# Altium PCB PCB_AVlabs AV-GMK MK I_2_2024-01-18 (1).pcbdoc (part 1 of 5)
Units mil, origin at the board's own origin, x right, y up, seen from the top; angles counter-clockwise.
Board outline 17777.1 x 9140.8 mil, 2 copper layers (Top Layer, Bottom Layer); 156 components, 279 nets, 1257 pads, 596 vias.
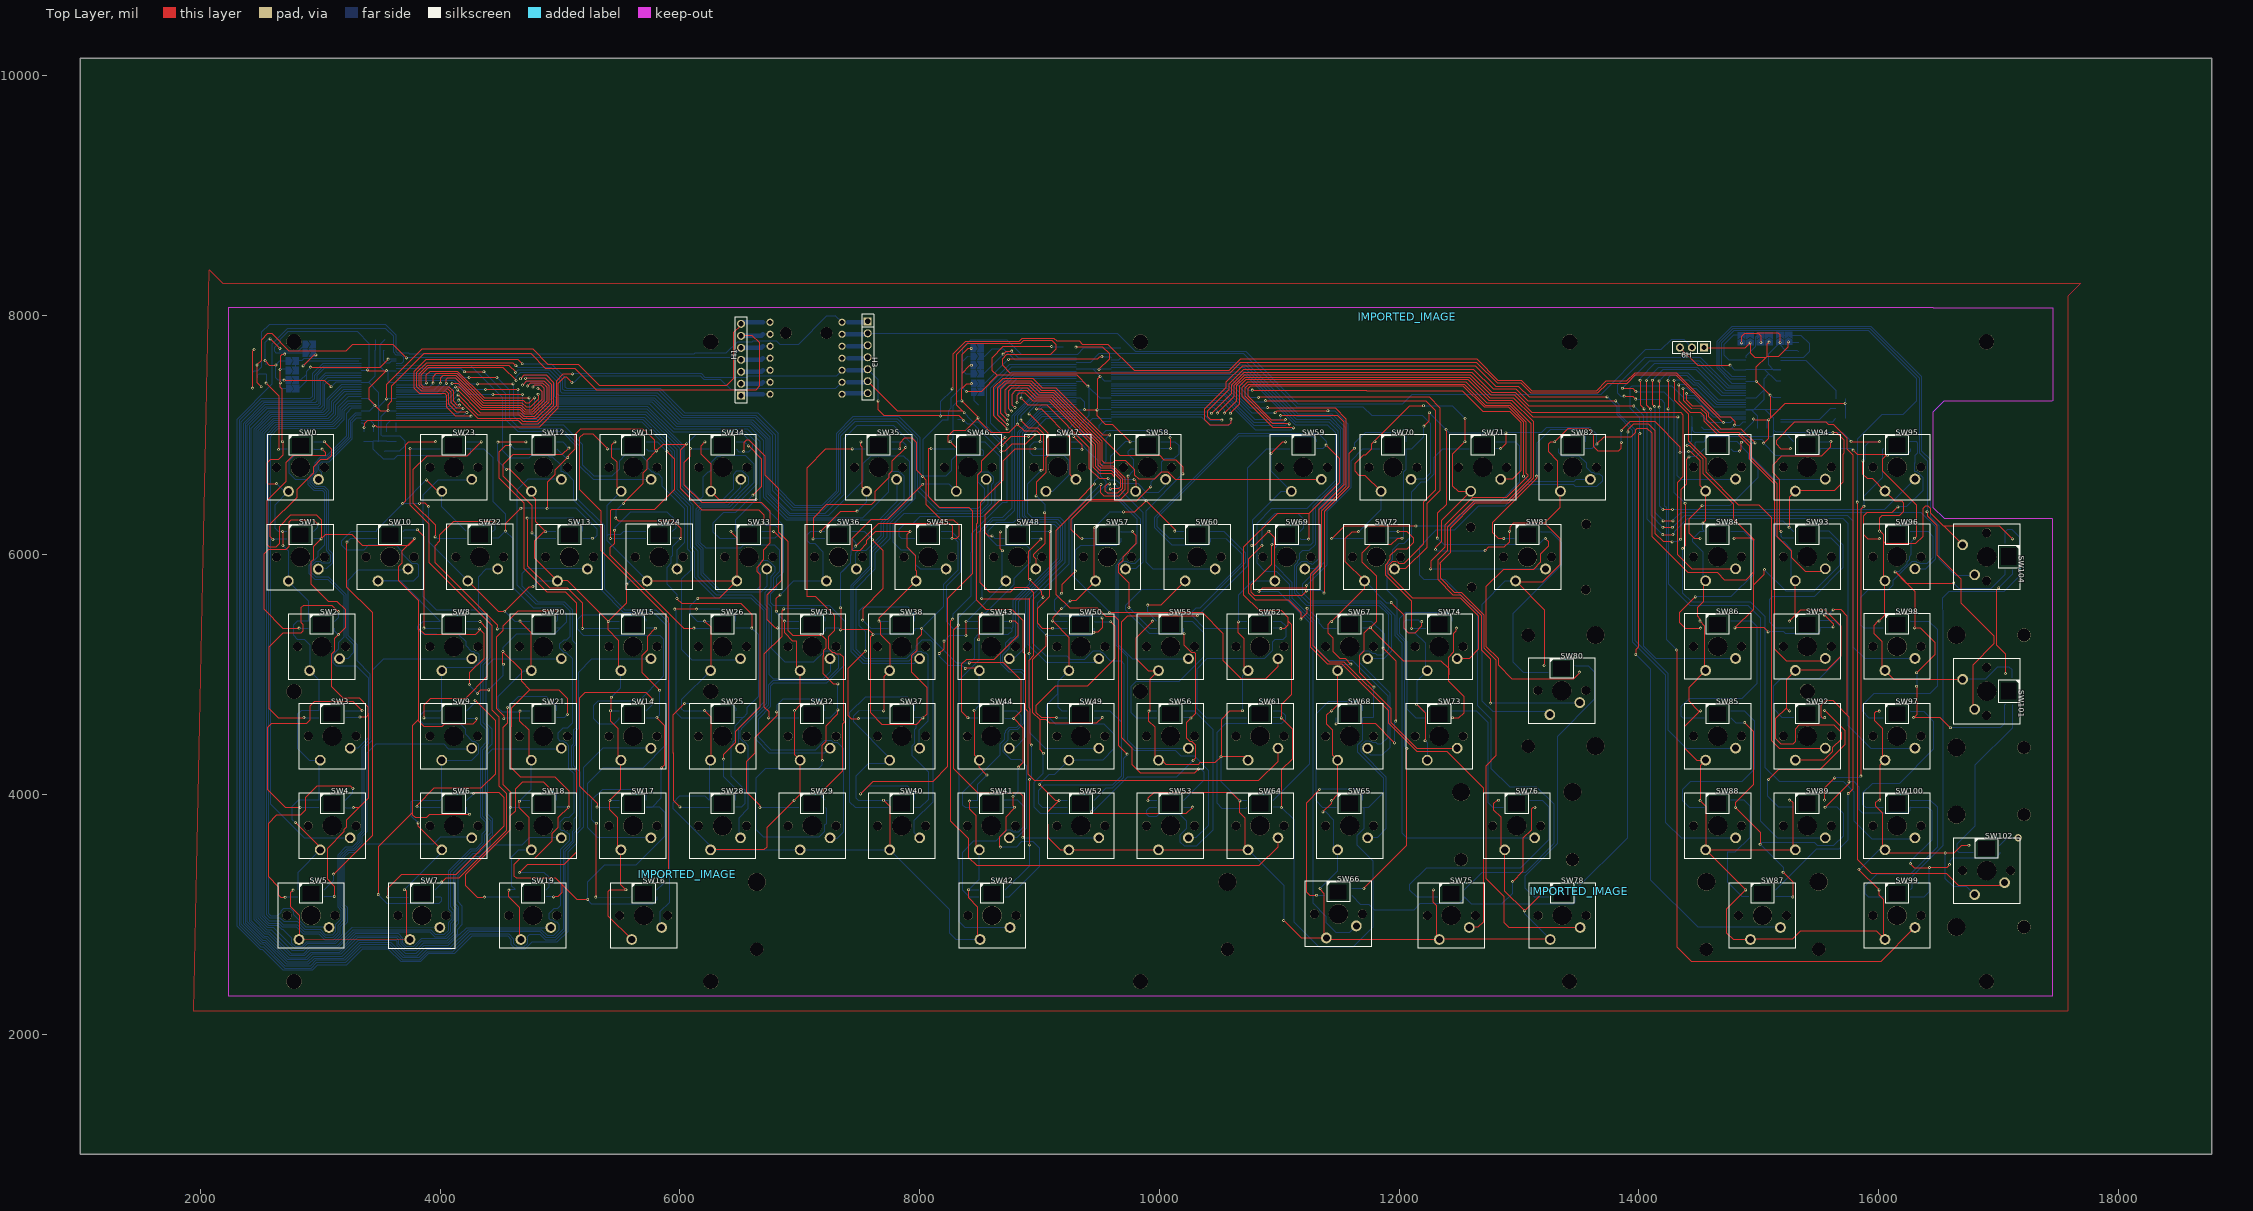
[diagram p0: Top Layer view]
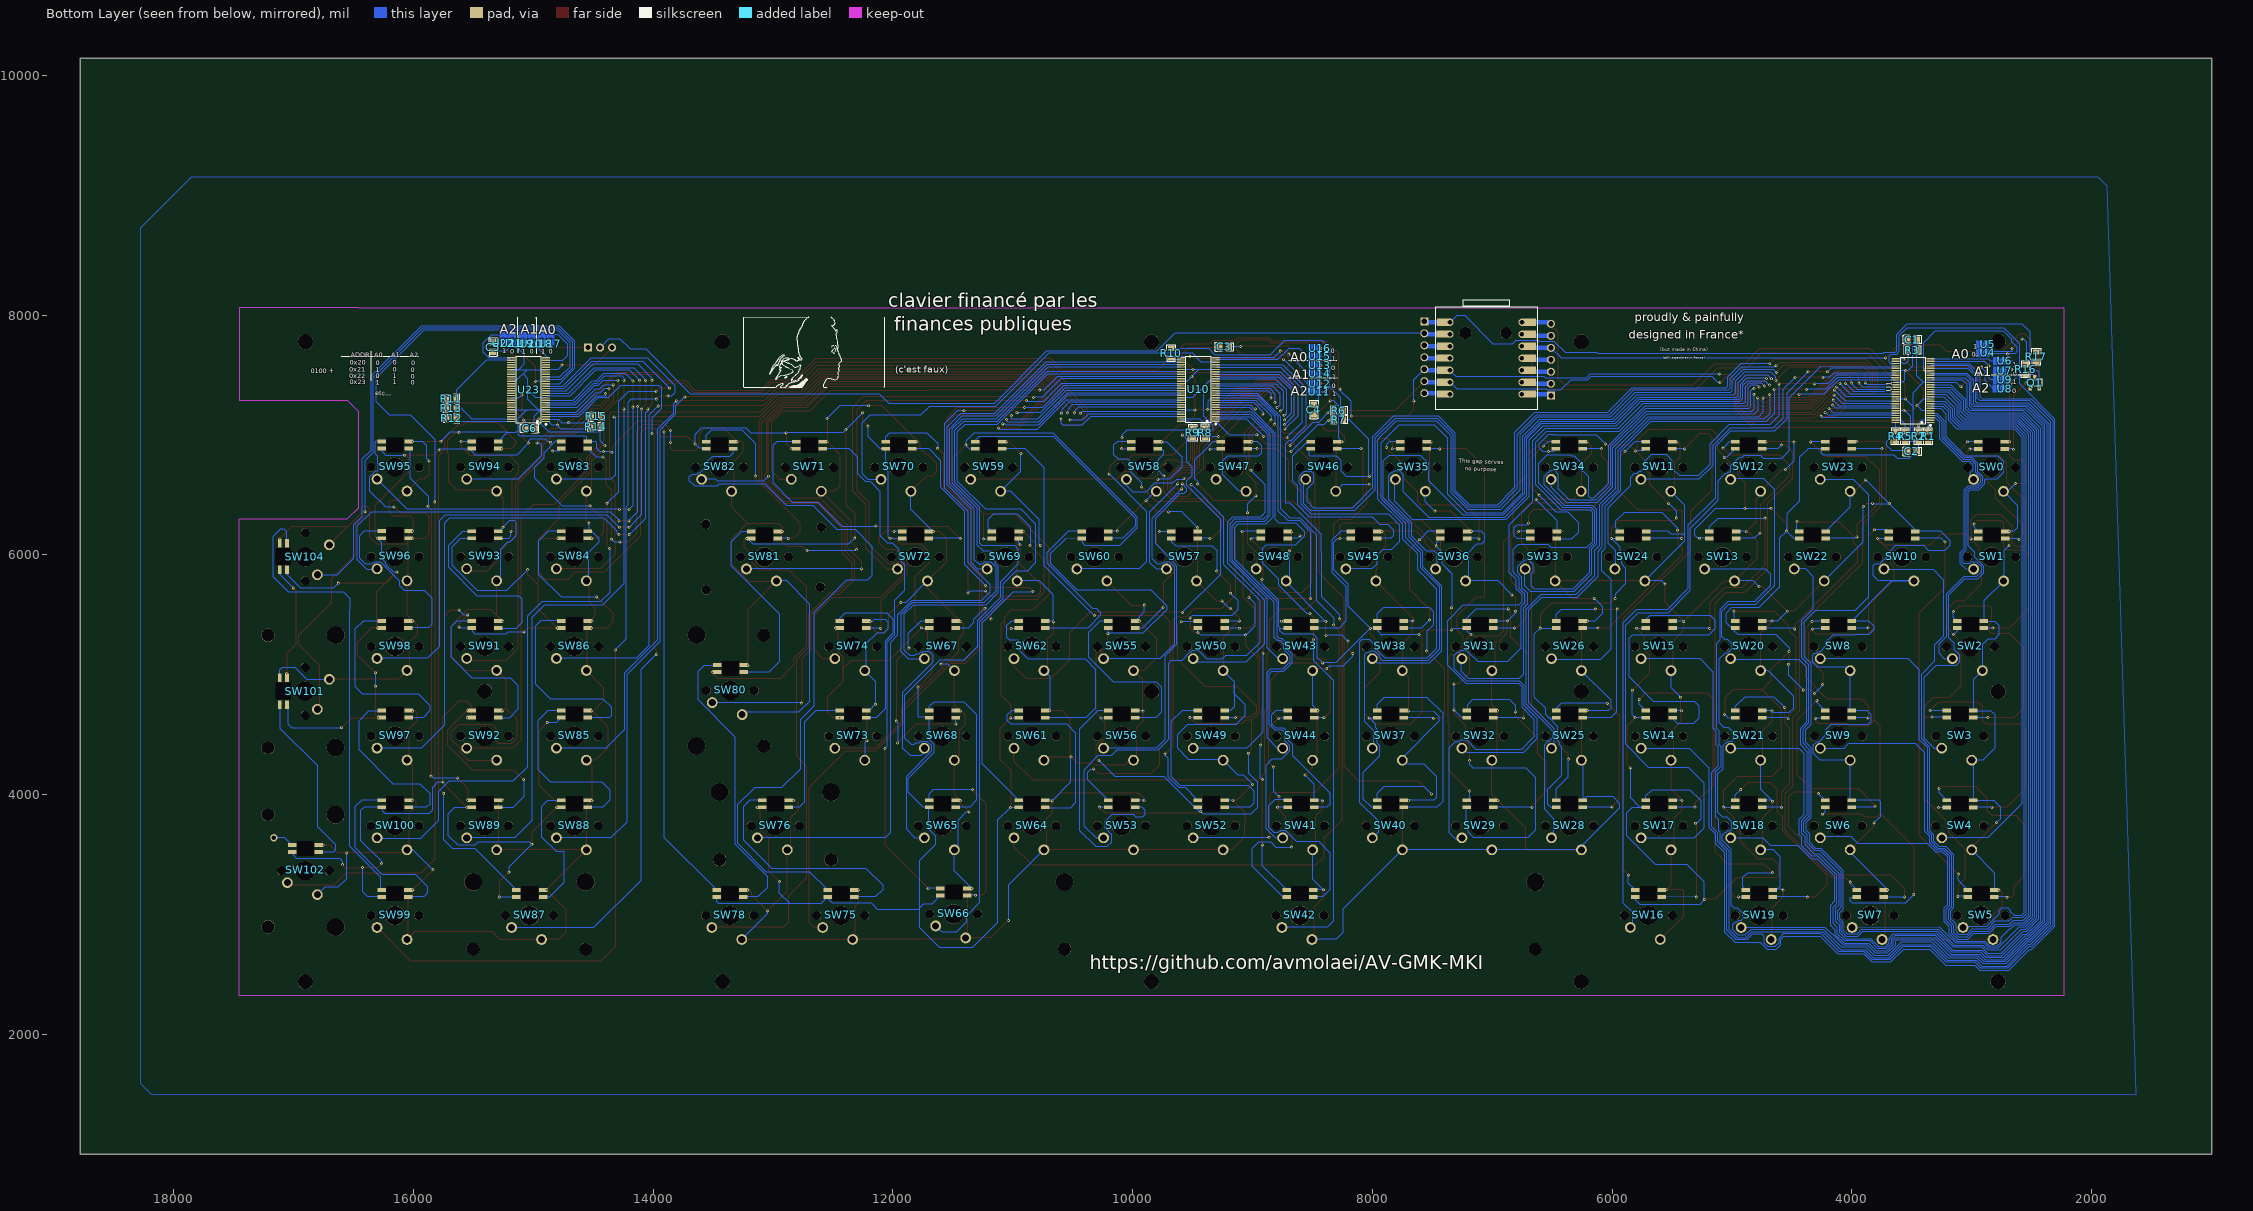
[diagram p1: Bottom Layer view, seen from below]

## Layer stack, top to bottom
Top Layer: signal copper (thickness not stored)
Dielectric: dielectric 12.6, FR-4, Dk 4.8
Bottom Layer: signal copper (thickness not stored)

## Board outline
18777.1,1000 1000,1000 1000,10140.8 18777.1,10140.8

## Components (designator, comment, footprint, x,y, rotation, side; value= is the part's Value field where it differs from the comment)
C1 "100nF" C0805 3498.7,7794.8 r180 bottom
C2 "100nF" C0805 3500.6,6863.3 r180 bottom
C3 "100nF" C0805 9237.9,7733.9 r180 bottom
C4 "100nF" C0805 8488.4,7211.4 r90 bottom
C5 "100nF" C0805 15331.7,7733.1 r90 bottom
C6 "100nF" C0805 15029,7053.8 r0 bottom
H1 "X6511WV-07H-C30D60" HDR-TH_7P-P2.54-V-M 6510.8,7626.8 r90 top
H3 "X6511WV-07H-C30D60" HDR-TH_7P-P2.54-V-M 7567.1,7647.7 r270 top
H9 "PCA_PINS" HDR-TH_3P-P2.54-V-M 14441.9,7728.5 r180 top
IMPORTED_IMAGE "IMPORTED_IMAGE" IMPORTED_IMAGE 13503.56,3192.67 r0 top
IMPORTED_IMAGE "IMPORTED_IMAGE" IMPORTED_IMAGE 6062.95,3334.43 r0 top
IMPORTED_IMAGE "IMPORTED_IMAGE" IMPORTED_IMAGE 12067.75,7984.55 r0 top
Q1 "BSS138NH6327" SOT-23-3_L2.9-W1.3-P1.90-LS2.4-BR 2474.6,7436.4 r90 bottom
R1 "4.7kΩ" R0805 3365.2,6987.6 r270 bottom
R2 "4.7kΩ" R0805 3443.5,6987.5 r270 bottom
R3 "1.1kΩ" R0805 3497.2,7708.1 r180 bottom
R4 "1.1kΩ" R0805 3634.7,6987.2 r270 bottom
R5 "2kΩ" R0805 3556.4,6987.4 r270 bottom
R6 "4.7kΩ" R0805 8280.9,7202.5 r180 bottom
R7 "4.7kΩ" R0805 8280.1,7127.8 r180 bottom
R8 "2kΩ" R0805 9396.2,7017.9 r270 bottom
R9 "1.1kΩ" R0805 9498.1,7017.3 r270 bottom
R10 "1.1kΩ" R0805 9679.1,7683.1 r90 bottom
R11 "1.1kΩ" R0805 15681.6,7301.8 r0 bottom
R12 "1.1kΩ" R0805 15680.8,7137.6 r0 bottom
R13 "2kΩ" R0805 15681.7,7223 r0 bottom
R14 "4.7kΩ" R0805 14479.4,7069 r180 bottom
R15 "4.7kΩ" R0805 14475.2,7154.6 r180 bottom
R16 "10kΩ" R0805 2552,7546.3 r270 bottom
R17 "10kΩ" R0805 2462.3,7652.6 r90 bottom
SW0 "CHERRYMX_1U_SK6812_MINI_E" CHERRYMX_1U_SK6812_MINI-E 2836,6729 r0 top
SW1 "CHERRYMX_1U_SK6812_MINI_E" CHERRYMX_1U_SK6812_MINI-E 2834.8,5981.1 r0 top
SW2 "CHERRYMX_1U_SK6812_MINI_E" CHERRYMX_1U_SK6812_MINI-E 3012.3,5233.8 r0 top
SW3 "CHERRYMX_1U_SK6812_MINI_E" CHERRYMX_1U_SK6812_MINI-E 3100.9,4487 r0 top
SW4 "CHERRYMX_1U_SK6812_MINI_E" CHERRYMX_1U_SK6812_MINI-E 3100.8,3739 r0 top
SW5 "CHERRYMX_1U_SK6812_MINI_E" CHERRYMX_1U_SK6812_MINI-E 2923.8,2991.3 r0 top
SW6 "CHERRYMX_1U_SK6812_MINI_E" CHERRYMX_1U_SK6812_MINI-E 4114.7,3739.3 r0 top
SW7 "CHERRYMX_1U_SK6812_MINI_E" CHERRYMX_1U_SK6812_MINI-E 3848.9,2991.1 r0 top
SW8 "CHERRYMX_1U_SK6812_MINI_E" CHERRYMX_1U_SK6812_MINI-E 4114.7,5233.6 r0 top
SW9 "CHERRYMX_1U_SK6812_MINI_E" CHERRYMX_1U_SK6812_MINI-E 4114.5,4486.6 r0 top
SW10 "CHERRYMX_1U_SK6812_MINI_E" CHERRYMX_1U_SK6812_MINI-E 3583.1,5981.8 r0 top
SW11 "CHERRYMX_1U_SK6812_MINI_E" CHERRYMX_1U_SK6812_MINI-E 5610.7,6729.8 r0 top
SW12 "CHERRYMX_1U_SK6812_MINI_E" CHERRYMX_1U_SK6812_MINI-E 4862.4,6729.8 r0 top
SW13 "CHERRYMX_1U_SK6812_MINI_E" CHERRYMX_1U_SK6812_MINI-E 5079.2,5981.8 r0 top
SW14 "CHERRYMX_1U_SK6812_MINI_E" CHERRYMX_1U_SK6812_MINI-E 5609.1,4486.5 r0 top
SW15 "CHERRYMX_1U_SK6812_MINI_E" CHERRYMX_1U_SK6812_MINI-E 5609.1,5233.8 r0 top
SW16 "CHERRYMX_1U_SK6812_MINI_E" CHERRYMX_1U_SK6812_MINI-E 5699,2991.4 r0 top
SW17 "CHERRYMX_1U_SK6812_MINI_E" CHERRYMX_1U_SK6812_MINI-E 5609.1,3739.3 r0 top
SW18 "CHERRYMX_1U_SK6812_MINI_E" CHERRYMX_1U_SK6812_MINI-E 4861.9,3739.3 r0 top
SW19 "CHERRYMX_1U_SK6812_MINI_E" CHERRYMX_1U_SK6812_MINI-E 4774.2,2991.3 r0 top
SW20 "CHERRYMX_1U_SK6812_MINI_E" CHERRYMX_1U_SK6812_MINI-E 4861.9,5233.8 r0 top
SW21 "CHERRYMX_1U_SK6812_MINI_E" CHERRYMX_1U_SK6812_MINI-E 4861.9,4486.5 r0 top
SW22 "CHERRYMX_1U_SK6812_MINI_E" CHERRYMX_1U_SK6812_MINI-E 4331.3,5981.9 r0 top
SW23 "CHERRYMX_1U_SK6812_MINI_E" CHERRYMX_1U_SK6812_MINI-E 4114.7,6729.7 r0 top
SW24 "CHERRYMX_1U_SK6812_MINI_E" CHERRYMX_1U_SK6812_MINI-E 5827.3,5981.9 r0 top
SW25 "CHERRYMX_1U_SK6812_MINI_E" CHERRYMX_1U_SK6812_MINI-E 6356.4,4486.5 r0 top
SW26 "CHERRYMX_1U_SK6812_MINI_E" CHERRYMX_1U_SK6812_MINI-E 6356.4,5233.8 r0 top
SW28 "CHERRYMX_1U_SK6812_MINI_E" CHERRYMX_1U_SK6812_MINI-E 6356.3,3739.3 r0 top
SW29 "CHERRYMX_1U_SK6812_MINI_E" CHERRYMX_1U_SK6812_MINI-E 7103.6,3739.3 r0 top
SW31 "CHERRYMX_1U_SK6812_MINI_E" CHERRYMX_1U_SK6812_MINI-E 7103.6,5233.7 r0 top
SW32 "CHERRYMX_1U_SK6812_MINI_E" CHERRYMX_1U_SK6812_MINI-E 7103.5,4486.5 r0 top
SW33 "CHERRYMX_1U_SK6812_MINI_E" CHERRYMX_1U_SK6812_MINI-E 6575.3,5981.8 r0 top
SW34 "CHERRYMX_1U_SK6812_MINI_E" CHERRYMX_1U_SK6812_MINI-E 6358.7,6729.8 r0 top
SW35 "CHERRYMX_1U_SK6812_MINI_E" CHERRYMX_1U_SK6812_MINI-E 7658.3,6729.6 r0 top
SW36 "CHERRYMX_1U_SK6812_MINI_E" CHERRYMX_1U_SK6812_MINI-E 7323,5981.7 r0 top
SW37 "CHERRYMX_1U_SK6812_MINI_E" CHERRYMX_1U_SK6812_MINI-E 7850.7,4486.6 r0 top
SW38 "CHERRYMX_1U_SK6812_MINI_E" CHERRYMX_1U_SK6812_MINI-E 7850.8,5233.8 r0 top
SW40 "CHERRYMX_1U_SK6812_MINI_E" CHERRYMX_1U_SK6812_MINI-E 7850.7,3739.3 r0 top
SW41 "CHERRYMX_1U_SK6812_MINI_E" CHERRYMX_1U_SK6812_MINI-E 8598,3739.3 r0 top
SW42 "CHERRYMX_1U_SK6812_MINI_E" CHERRYMX_1U_SK6812_MINI-E 8604.6,2991.3 r0 top
SW43 "CHERRYMX_1U_SK6812_MINI_E" CHERRYMX_1U_SK6812_MINI-E 8598.1,5233.8 r0 top
SW44 "CHERRYMX_1U_SK6812_MINI_E" CHERRYMX_1U_SK6812_MINI-E 8598.1,4486.5 r0 top
SW45 "CHERRYMX_1U_SK6812_MINI_E" CHERRYMX_1U_SK6812_MINI-E 8071.2,5981.8 r0 top
SW46 "CHERRYMX_1U_SK6812_MINI_E" CHERRYMX_1U_SK6812_MINI-E 8406,6729.9 r0 top
SW47 "CHERRYMX_1U_SK6812_MINI_E" CHERRYMX_1U_SK6812_MINI-E 9154,6729.8 r0 top
SW48 "CHERRYMX_1U_SK6812_MINI_E" CHERRYMX_1U_SK6812_MINI-E 8819.4,5981.8 r0 top
SW49 "CHERRYMX_1U_SK6812_MINI_E" CHERRYMX_1U_SK6812_MINI-E 9345.3,4486.5 r0 top
SW50 "CHERRYMX_1U_SK6812_MINI_E" CHERRYMX_1U_SK6812_MINI-E 9345.3,5233.8 r0 top
SW52 "CHERRYMX_1U_SK6812_MINI_E" CHERRYMX_1U_SK6812_MINI-E 9345.3,3739.3 r0 top
SW53 "CHERRYMX_1U_SK6812_MINI_E" CHERRYMX_1U_SK6812_MINI-E 10092.6,3739.3 r0 top
SW55 "CHERRYMX_1U_SK6812_MINI_E" CHERRYMX_1U_SK6812_MINI-E 10092.6,5233.8 r0 top
SW56 "CHERRYMX_1U_SK6812_MINI_E" CHERRYMX_1U_SK6812_MINI-E 10092.6,4486.6 r0 top
SW57 "CHERRYMX_1U_SK6812_MINI_E" CHERRYMX_1U_SK6812_MINI-E 9567.4,5981.8 r0 top
SW58 "CHERRYMX_1U_SK6812_MINI_E" CHERRYMX_1U_SK6812_MINI-E 9902,6729.8 r0 top
SW59 "CHERRYMX_1U_SK6812_MINI_E" CHERRYMX_1U_SK6812_MINI-E 11201.2,6729.8 r0 top
SW60 "CHERRYMX_1U_SK6812_MINI_E" CHERRYMX_1U_SK6812_MINI-E 10315.4,5981.8 r0 top
SW61 "CHERRYMX_1U_SK6812_MINI_E" CHERRYMX_1U_SK6812_MINI-E 10839.8,4486.6 r0 top
SW62 "CHERRYMX_1U_SK6812_MINI_E" CHERRYMX_1U_SK6812_MINI-E 10839.8,5233.8 r0 top
SW64 "CHERRYMX_1U_SK6812_MINI_E" CHERRYMX_1U_SK6812_MINI-E 10839.8,3739.3 r0 top
SW65 "CHERRYMX_1U_SK6812_MINI_E" CHERRYMX_1U_SK6812_MINI-E 11587,3739.3 r0 top
SW66 "CHERRYMX_1U_SK6812_MINI_E" CHERRYMX_1U_SK6812_MINI-E 11492.8,3004.2 r0 top
SW67 "CHERRYMX_1U_SK6812_MINI_E" CHERRYMX_1U_SK6812_MINI-E 11587,5233.8 r0 top
SW68 "CHERRYMX_1U_SK6812_MINI_E" CHERRYMX_1U_SK6812_MINI-E 11587,4486.5 r0 top
SW69 "CHERRYMX_1U_SK6812_MINI_E" CHERRYMX_1U_SK6812_MINI-E 11063.4,5981.8 r0 top
SW70 "CHERRYMX_1U_SK6812_MINI_E" CHERRYMX_1U_SK6812_MINI-E 11949.2,6729.8 r0 top
SW71 "CHERRYMX_1U_SK6812_MINI_E" CHERRYMX_1U_SK6812_MINI-E 12697.2,6729.9 r0 top
SW72 "CHERRYMX_1U_SK6812_MINI_E" CHERRYMX_1U_SK6812_MINI-E 11811.4,5981.8 r0 top
SW73 "CHERRYMX_1U_SK6812_MINI_E" CHERRYMX_1U_SK6812_MINI-E 12334.3,4486.5 r0 top
SW74 "CHERRYMX_1U_SK6812_MINI_E" CHERRYMX_1U_SK6812_MINI-E 12334.2,5233.8 r0 top
SW75 "CHERRYMX_1U_SK6812_MINI_E" CHERRYMX_1U_SK6812_MINI-E 12435,2991.3 r0 top
SW76 "CHERRYMX_1U_SK6812_MINI_E" CHERRYMX_1U_SK6812_MINI-E 12980.7,3739.3 r0 top
SW78 "CHERRYMX_1U_SK6812_MINI_E" CHERRYMX_1U_SK6812_MINI-E 13360.2,2991.3 r0 top
SW80 "CHERRYMX_1U_SK6812_MINI_E" CHERRYMX_1U_SK6812_MINI-E 13356.7,4867.2 r0 top
SW81 "CHERRYMX_1U_SK6812_MINI_E" CHERRYMX_1U_SK6812_MINI-E 13071.3,5981.8 r0 top
SW82 "CHERRYMX_1U_SK6812_MINI_E" CHERRYMX_1U_SK6812_MINI-E 13445.4,6729.8 r0 top
SW83 "CHERRYMX_1U_SK6812_MINI_E" CHERRYMX_1U_SK6812_MINI-E 14656.4,6731.4 r0 top
SW84 "CHERRYMX_1U_SK6812_MINI_E" CHERRYMX_1U_SK6812_MINI-E 14656.4,5983.4 r0 top
SW85 "CHERRYMX_1U_SK6812_MINI_E" CHERRYMX_1U_SK6812_MINI-E 14656.4,4487.3 r0 top
SW86 "CHERRYMX_1U_SK6812_MINI_E" CHERRYMX_1U_SK6812_MINI-E 14656.4,5235.4 r0 top
SW87 "CHERRYMX_1U_SK6812_MINI_E" CHERRYMX_1U_SK6812_MINI-E 15030.4,2991.3 r0 top
SW88 "CHERRYMX_1U_SK6812_MINI_E" CHERRYMX_1U_SK6812_MINI-E 14656.4,3739.3 r0 top
SW89 "CHERRYMX_1U_SK6812_MINI_E" CHERRYMX_1U_SK6812_MINI-E 15404.4,3739.3 r0 top
SW91 "CHERRYMX_1U_SK6812_MINI_E" CHERRYMX_1U_SK6812_MINI-E 15404.4,5235.3 r0 top
SW92 "CHERRYMX_1U_SK6812_MINI_E" CHERRYMX_1U_SK6812_MINI-E 15404.4,4487.3 r0 top
SW93 "CHERRYMX_1U_SK6812_MINI_E" CHERRYMX_1U_SK6812_MINI-E 15404.5,5983.4 r0 top
SW94 "CHERRYMX_1U_SK6812_MINI_E" CHERRYMX_1U_SK6812_MINI-E 15404.5,6731.4 r0 top
SW95 "CHERRYMX_1U_SK6812_MINI_E" CHERRYMX_1U_SK6812_MINI-E 16152.4,6731.4 r0 top
SW96 "CHERRYMX_1U_SK6812_MINI_E" CHERRYMX_1U_SK6812_MINI-E 16152.4,5983.5 r0 top
SW97 "CHERRYMX_1U_SK6812_MINI_E" CHERRYMX_1U_SK6812_MINI-E 16152.4,4487.4 r0 top
SW98 "CHERRYMX_1U_SK6812_MINI_E" CHERRYMX_1U_SK6812_MINI-E 16152.5,5235.4 r0 top
SW99 "CHERRYMX_1U_SK6812_MINI_E" CHERRYMX_1U_SK6812_MINI-E 16152.6,2991.3 r0 top
SW100 "CHERRYMX_1U_SK6812_MINI_E" CHERRYMX_1U_SK6812_MINI-E 16152.4,3739.3 r0 top
SW101 "CHERRYMX_1U_SK6812_MINI_E" CHERRYMX_1U_SK6812_MINI-E 16900.5,4861.4 r270 top
SW102 "CHERRYMX_1U_SK6812_MINI_E" CHERRYMX_1U_SK6812_MINI-E 16900.5,3365.3 r0 top
SW104 "CHERRYMX_1U_SK6812_MINI_E" CHERRYMX_1U_SK6812_MINI-E 16900.5,5983.4 r270 top
U1 "PCA9505DGG,118" TSSOP-56_L14.0-W6.1-P0.50-LS8.1-BL 3490.4,7368.7 r270 bottom
U4 "beautiful-solderbridge" BEAUTIFUL-SOLDER-BRIDGE 2866.7,7683.3 r0 bottom
U5 "beautiful-solderbridge" BEAUTIFUL-SOLDER-BRIDGE 2866.9,7754.9 r0 bottom
U6 "beautiful-solderbridge" BEAUTIFUL-SOLDER-BRIDGE 2723.7,7616.6 r0 bottom
U7 "beautiful-solderbridge" BEAUTIFUL-SOLDER-BRIDGE 2724.5,7536.6 r0 bottom
U8 "beautiful-solderbridge" BEAUTIFUL-SOLDER-BRIDGE 2727.4,7385.8 r0 bottom
U9 "beautiful-solderbridge" BEAUTIFUL-SOLDER-BRIDGE 2725.6,7459 r0 bottom
U10 "PCA9505DGG,118" TSSOP-56_L14.0-W6.1-P0.50-LS8.1-BL 9452.4,7378.8 r270 bottom
U11 "beautiful-solderbridge" BEAUTIFUL-SOLDER-BRIDGE 8442,7359 r0 bottom
U12 "beautiful-solderbridge" BEAUTIFUL-SOLDER-BRIDGE 8441,7428.6 r0 bottom
U13 "beautiful-solderbridge" BEAUTIFUL-SOLDER-BRIDGE 8438.8,7581.3 r0 bottom
U14 "beautiful-solderbridge" BEAUTIFUL-SOLDER-BRIDGE 8439.2,7511 r0 bottom
U15 "beautiful-solderbridge" BEAUTIFUL-SOLDER-BRIDGE 8438.6,7654.4 r0 bottom
U16 "beautiful-solderbridge" BEAUTIFUL-SOLDER-BRIDGE 8438.2,7724.1 r0 bottom
U17 "beautiful-solderbridge" BEAUTIFUL-SOLDER-BRIDGE 14857.3,7760 r90 bottom
U18 "beautiful-solderbridge" BEAUTIFUL-SOLDER-BRIDGE 14927.6,7760.1 r90 bottom
U19 "beautiful-solderbridge" BEAUTIFUL-SOLDER-BRIDGE 15085.8,7761.3 r90 bottom
U20 "beautiful-solderbridge" BEAUTIFUL-SOLDER-BRIDGE 15015.6,7761.4 r90 bottom
U21 "beautiful-solderbridge" BEAUTIFUL-SOLDER-BRIDGE 15177.3,7764.2 r90 bottom
U22 "beautiful-solderbridge" BEAUTIFUL-SOLDER-BRIDGE 15248.5,7765.7 r90 bottom
U23 "PCA9505DGG,118" TSSOP-56_L14.0-W6.1-P0.50-LS8.1-BL 15038.7,7377.5 r270 bottom
? "" ? 17265.58,6833.97 r0 top
? "" ? 17176.35,8707.6 r0 top
? "" ? 2506.25,8085.2 r0 top
? "" ? 4519.36,8487.65 r0 top
? "" ? 9839.94,8297.44 r0 top
? "" ? 8050.12,8143.35 r0 top
? "" ? 1998.05,7430.16 r0 top
? "" ? 17701.31,7675.64 r0 top
? "" ? 2300.95,7926 r0 top
? "" ? 15161.16,8677.7 r0 top

## Footprints (in the part's own frame and the unit in brackets; to place one, negate y for a bottom-side part, rotate by r counter-clockwise, add the part's x,y. Pads: shape width x height; smd on the part's side, far side on the other; paste and mask are expansions set on the pad)
BEAUTIFUL-SOLDER-BRIDGE [mil]
  Top Layer region: 96.46,-31.5 37.4,-31.5 57.09,0 37.4,31.5 96.46,31.5
  Top Layer region: 47.24,0 27.56,-31.5 -11.81,-31.5 -11.81,31.5 27.56,31.5
C0805 [mm]
  rect 1.41x1.35 smd paste-100 mask+0.051: 1(1,0) 2(-1,0)
  silkscreen extent -1.96,-0.9 1.96,0.9
CHERRYMX_1U_SK6812_MINI-E [mm]
  rect 1.8x0.82 smd far side paste+0 mask+0.102: DI(-2.854,3.923) DO(2.796,5.423) GND(-2.854,5.423) VCC(2.796,3.923)
  round 2.286 hole 1.499 paste+0 mask+0.051: SW1(3.81,-2.539) SW2(-2.54,-5.079)
  round 1.905 hole 1.905 unplated paste+0: ""(-5.08,0.001) ""(5.08,0.001)
  round 4.089 hole 4.089 unplated paste+0: ""(0,0.001)
  round 3.9 hole 3.9 unplated paste+0: ""(0,0.001)
  Multi-Layer board cut-out: 1.6,3.301 1.6,6.1 -1.6,6.1 -1.6,3.301
  Multi-Layer board cut-out: -1.78,3.124 -1.78,6.224 1.715,6.224 1.715,3.124
  silkscreen extent -6.99,-6.98 6.98,6.99
HDR-TH_3P-P2.54-V-M [mm]
  rect 1.7x1.7 hole 1.1 paste+0 mask+0.051: 1(-2.54,0)
  round 1.7 hole 1.1 paste+0 mask+0.051: 2(0,0) 3(2.54,0)
  silkscreen extent -4.02,-1.27 4.02,1.27
HDR-TH_7P-P2.54-V-M [mm]
  rect 1.7x1.7 hole 1.1 paste+0 mask+0.051: 1(-7.62,0)
  round 1.7 hole 1.1 paste+0 mask+0.051: 2(-5.08,0) 3(-2.54,0) 4(0,0) 5(2.54,0) 6(5.08,0) 7(7.62,0)
  silkscreen extent -9.1,-1.27 9.1,1.27
IMPORTED_IMAGE [mil]
R0805 [mil]
  rect 44.59x54.21 smd paste-3937.01 mask+2: 1(39.37,0) 2(-39.37,0)
  silkscreen extent -69,-36 69,36
SOT-23-3_L2.9-W1.3-P1.90-LS2.4-BR [mm]
  rect 1.25x0.7 smd paste+0 mask+0.051: 1(-1,0.95) 2(-1,-0.95) 3(1,0)
  silkscreen extent -0.73,-1.53 0.73,1.53
TSSOP-56_L14.0-W6.1-P0.50-LS8.1-BL [mm]
  oval 0.28x1.7 smd paste+0 mask+0.051: 1(6.75,3.7) 2(6.25,3.7) 3(5.75,3.7) 4(5.25,3.7) 5(4.75,3.7) 6(4.25,3.7) 7(3.75,3.7) 8(3.25,3.7) 9(2.75,3.7) 10(2.25,3.7) 11(1.75,3.7) 12(1.25,3.7) 13(0.75,3.7) 14(0.25,3.7) 15(-0.25,3.7) 16(-0.75,3.7) 17(-1.25,3.7) 18(-1.75,3.7) 19(-2.25,3.7) 20(-2.75,3.7) 21(-3.25,3.7) 22(-3.75,3.7) 23(-4.25,3.7) 24(-4.75,3.7) 25(-5.25,3.7) 26(-5.75,3.7) 27(-6.25,3.7) 28(-6.75,3.7) 29(-6.75,-3.7) 30(-6.25,-3.7) 31(-5.75,-3.7) 32(-5.25,-3.7) 33(-4.75,-3.7) 34(-4.25,-3.7) 35(-3.75,-3.7) 36(-3.25,-3.7) 37(-2.75,-3.7) 38(-2.25,-3.7) 39(-1.75,-3.7) 40(-1.25,-3.7) 41(-0.75,-3.7) 42(-0.25,-3.7) 43(0.25,-3.7) 44(0.75,-3.7) 45(1.25,-3.7) 46(1.75,-3.7) 47(2.25,-3.7) 48(2.75,-3.7) 49(3.25,-3.7) 50(3.75,-3.7) 51(4.25,-3.7) 52(4.75,-3.7) 53(5.25,-3.7) 54(5.75,-3.7) 55(6.25,-3.7) 56(6.75,-3.7)
  silkscreen extent -7.08,-2.62 7.49,3.85
? [mil]

## Free pads (board coordinates)
  round 59.05 hole 39.37 paste+0 mask+2.01: 1(7353.2,7939.8) 2(7353.2,7839.8) 3(7353.2,7739.8) 4(7353.2,7639.8) 5(7353.2,7539.8) 6(7353.44,7439.56) 7(7353.44,7339.56) 8(6753.44,7339.56) 9(6753.44,7439.56) 10(6753.44,7539.56) 11(6753.44,7639.56) 12(6753.44,7739.56) 13(6753.44,7839.56) 14(6753.2,7939.8)
  rect 118.11x59.05 smd far side paste+0 mask+2.01: 1(7403.44,7939.56) 2(7405.44,7840.23) 3(7403.44,7739.56) 4(7405.44,7640.23) 5(7403.44,7539.56) 6(7403.44,7439.56) 7(7403.48,7340.55) 8(6693.44,7339.56) 9(6693.44,7439.56) 10(6693.44,7539.56) 11(6693.44,7639.56) 12(6693.44,7739.56) 13(6693.44,7839.56) 14(6693.44,7939.56)
  round 60 hole 36 paste+4 mask+2: 15(17163.4,3639.6)
  round 125.98 hole 125.98 unplated paste+0: ""(2781.3,7777) ""(2781.7,2439.9) ""(2782.09,4860.33) ""(6258,4860.33) ""(6258.4,2439.8) ""(6258.4,7776.1) ""(9841.18,4860.33) ""(9841.97,7776.4) ""(9842.11,2439.88) ""(13421.64,2439.88) ""(13423.06,7776.4) ""(15404.7,4861.4) ""(16899.81,2439.88) ""(16900.4,7776.8)
  round 149.61 hole 149.61 unplated paste+0: ""(6641.7,3270.7) ""(10568.2,3271.9) ""(12516.6,4019.9) ""(13445.5,4021.2) ""(13637.5,4404.5) ""(13637.9,5329.7) ""(14563,3273) ""(15499.5,3272.9) ""(16647.8,2894.6) ""(16648,5330) ""(16648.8,4392.5) ""(16649,3832.1)
  round 110.24 hole 110.24 unplated paste+0: ""(6642,2709.1) ""(10567.2,2709.9) ""(12516.6,3458.2) ""(13076.2,4402.8) ""(13076.4,5329.7) ""(13445.5,3457.8) ""(14562.3,2708.3) ""(15499.9,2709.2) ""(17211.1,4392) ""(17211.6,2896.6) ""(17212.1,3833.6) ""(17212.5,5329.9)
  round 98.43 hole 98.43 unplated paste+0: ""(6883.44,7849.56) ""(7223.44,7849.56)
  round 80 hole 80 unplated paste+0: ""(12597.3,6229.7) ""(12604.7,5729.7) ""(13556.6,5707.4) ""(13560.3,6255.6)

## Via types
v1: diameter 24.41, hole 12.2, Top Layer to Bottom Layer, tented both sides, 596 vias

## Nets (pads, with @x,y where several pads share a name; then routed paths per layer and width w, separated by ;. In a path a pad name is that pad's centre, name@x,y a point inside that pad or via, vN(x,y) a via of type N, cw(c..) or ccw(c..) an arc to the next point about the centre after c; other vN are vias at no path point)
1_A0: U1.27 | length 733.6
  Top Layer w10: v1(2857.5,7575) 2950.3,7667.8 v1(2964.9,7667.8)
  Bottom Layer w10: v1(2857.5,7575) 2897,7613.9 U1.27@3320,7613.9 ; 2933.83,7754.9 2933.63,7754.7 2933.63,7683.3 2949.4,7683.3 v1(2964.9,7667.8)
1_A1: U1.28 | length 654.4
  Bottom Layer w10: 2780.7,7610.19 2787.1,7616.59 2790.63,7616.59 ; 2791.43,7536.6 2790.63,7537.4 2790.63,7616.59 ; U1.28@3344.73,7634.45 2863.85,7634.45 2845.99,7616.59 2790.63,7616.59
1_A2: U1.29 | length 1106.7
  Top Layer w10: v1(2921,7566.3) 3500.5,7566.3 v1(3567,7632.8)
  Bottom Layer w10: 2792.53,7459 2838.66,7459 2887,7507.34 ; 2794.33,7385.8 2821.5,7385.8 2887,7451.3 2887,7532.3 v1(2921,7566.3) ; v1(3567,7632.8) 3568.65,7634.45 U1.29@3636.07,7634.45
1_INT_PCA: R5.2 U1.55 | length 156.9
  Bottom Layer w10: R5.2@3556.4,7026.77 3556.4,7090.9 3588.14,7122.64 U1.55@3636.07,7122.64
1_IO_0_0: SW0.SW1 U1.3 | length 758.8
  Bottom Layer w10: SW0.SW1@2985.99,6629.02 3012.8,6629 3012.8,6682.4 2987.1,6708.1 2987.1,6750.1 3015.1,6778.1 3076.6,6778.1 3266.5,6968 3266.5,7104.8 3304.02,7142.32 U1.3@3344.73,7142.32
1_IO_0_1: SW1.SW1 U1.4 | length 1716.2
  Bottom Layer w10: SW1.SW1@2984.79,5881.12 3052.3,5882 3100.3,5930 3100.3,6011.3 3066.9,6044.7 3066.9,6538 3032.7,6572.2 2962.3,6572.2 2930,6604.5 2930,6652.4 2970.1,6692.5 2970.1,6758.5 3006.6,6795 3070.1,6795 3249.4,6974.3 3249.4,7114.6 3296.81,7162.01 U1.4@3344.73,7162.01
1_IO_0_2: SW2.SW1 U1.5 | length 2850.4
  Bottom Layer w10: SW2.SW1@3162.29,5133.82 3228.8,5132.9 3277,5181.1 3277,5255.1 3214.7,5317.4 3214.7,5668.9 3068.7,5814.9 2962.8,5814.9 2923,5854.7 2923,5902.6 2963.9,5943.5 3003.6,5943.5 3018.3,5928.8 3071.1,5928.8 3084.3,5942 3084.3,6002.5 3050.9,6035.9 3050.9,6528.9 3024.8,6555 2956.8,6555 2913.7,6598.1 2913.7,6658.8 2953.3,6698.4 2953.3,6764.5 3000.8,6812 3063.8,6812 3233.3,6981.5 3233.3,7121.7 3293.29,7181.69 U1.5@3344.73,7181.69
1_IO_0_3: SW3.SW1 U1.7 | length 4110.6
  Bottom Layer w10: SW3.SW1@3250.89,4387.02 3313.5,4387.2 3400.6,4474.3 3400.6,4973.6 3299.8,5074.4 3134.1,5074.4 3104.9,5103.6 3104.9,5165.1 3152.8,5213 3152.8,5265.1 3198.5,5310.8 3198.5,5662.2 3063.5,5797.2 2955.6,5797.2 2905.6,5847.2 2905.6,5910.1 2979.9,5984.4 2979.9,6025.8 3034.9,6080.7 3034.9,6522.3 3018.5,6538.6 2946.4,6538.6 2895.6,6589.4 2895.6,6622.2 2887.7,6630.1 2793.5,6630.1 2737.8,6685.8 2737.8,6782.2 2783.7,6828.1 3056.8,6828.1 3216.9,6988.2 3216.9,7178.1 3259.9,7221.1 U1.7@3344.73,7221.06
1_IO_0_4: SW4.SW1 U1.8 | length 4757.8
  Bottom Layer w10: SW4.SW1@3250.79,3639.02 2869,3638.3 2582,3925.3 2582,6984.5 2648,7050.5 3124.1,7050.5 3198.5,7124.9 3198.5,7196.79 3242.45,7240.75 U1.8@3344.73,7240.75
1_IO_0_5: SW5.SW1 U1.9 | length 5556.4
  Bottom Layer w10: SW5.SW1@3065.26,2882.8 SW5.SW1@3073.79,2891.32 3069,2896.1 2879.2,2896.1 2774.4,3000.9 2774.4,3027.1 2750.9,3050.6 2695.4,3050.6 2674.9,3030.1 2674.9,3019.1 2643.4,2987.6 2588.9,2987.6 2565.8,3010.7 2565.8,6994.2 2639.4,7067.8 3111.3,7067.8 3181.4,7137.9 3181.4,7206.6 3235.2,7260.4 U1.9@3344.73,7260.43
1_IO_0_6: SW10.SW1 U1.10 | length 9338.8
  Bottom Layer w10: U1.10@3344.73,7280.12 3224.3,7280.1 3163.3,7219.1 3163.3,7146 3101.2,7083.8 2630.5,7083.8 2548.4,7001.8 2548.4,3002.1 2579.4,2971.1 2664.9,2971.1 2694.4,2941.6 2807.7,2941.6 2873.6,2875.7 2999.5,2875.7 3043.4,2831.8 3104.2,2831.8 3130.6,2858.2 3130.6,2917.5 3176.3,2963.2 3176.3,3031.8 3149.2,3058.9 3149.2,3499.6 3215.6,3566 3272.7,3566 3317.7,3611 3317.7,3666.7 3350.6,3699.6 3350.6,4396 3419.2,4464.6 3419.2,5005.2 3308.4,5116 3308.4,5248.9 3233.4,5323.9 3233.4,5788.4 3319.1,5874.1 3725.4,5874.1 SW10.SW1@3733.09,5881.82
1_IO_0_7: SW8.SW1 U1.12 | length 8944.8
  Bottom Layer w10: U1.12@3344.73,7319.49 3233.4,7319.5 3145.9,7232 3145.9,7153.8 3092,7099.9 2618.6,7099.9 2529.4,7010.7 2529.4,2995.3 2575.9,2948.7 2657.9,2948.7 2692.5,2914.1 2808.4,2914.1 2866.2,2856.3 2995.8,2856.3 3040.9,2811.2 3109.4,2811.2 3149.9,2851.7 3149.9,2910.7 3194.4,2955.2 3194.4,3039.2 3167.9,3065.7 3167.9,3493.2 3224.7,3550 3280.1,3550 3335.4,3605.2 3335.4,3661.2 3369.9,3695.7 3369.9,4389.2 3438.4,4457.7 3438.4,5039.2 3530.1,5130.9 4262,5130.9 SW8.SW1@4264.69,5133.62
1_IO_1_0: SW9.SW1 U1.13 | length 8372.6
  Bottom Layer w10: U1.13@3344.73,7339.17 3218.7,7339.2 3126.6,7247.1 3126.6,7168.1 3076.7,7118.2 2612.9,7118.2 2513.2,7018.6 2513.2,2987.5 2572.3,2928.4 2653.5,2928.4 2686,2895.9 2801.8,2895.9 2857.6,2840.1 2989.3,2840.1 2989.3,2838.4 3036.8,2790.9 3114,2790.9 3166.6,2843.5 3166.6,2902.7 3212.9,2949 3212.9,3045.3 3186.3,3071.9 3186.3,3486.5 3233.8,3533.9 3288.2,3533.9 3351.8,3597.5 3351.8,3653.5 3392.3,3694 3392.3,4348.1 3466.3,4422.1 4030.3,4422.1 4070.3,4382.1 4260,4382.1 SW9.SW1@4264.49,4386.62
1_IO_1_1: SW6.SW1 U1.14 | length 7744.3
  Bottom Layer w10: U1.14@3344.73,7358.86 3202.3,7358.9 3107.4,7264 3107.4,7181.4 3062.2,7136.2 2607.4,7136.2 2496.8,7025.6 2496.8,2980.9 2566.8,2910.9 2646.5,2910.9 2679.1,2878.3 2687.6,2878.3 2761,2804.9 2761,2764.7 2792.2,2733.5 2849.6,2733.5 2890,2773.9 3123.5,2773.9 3189.1,2839.5 3189.1,2899.6 3230.4,2940.9 3230.4,3054.1 3202.8,3081.7 3202.8,3479.4 3241.3,3517.9 3295.9,3517.9 3368.9,3590.4 3948.5,3590.4 4005.4,3647.3 4256.7,3647.3 SW6.SW1@4264.69,3639.32
1_IO_1_2: SW7.SW1 U1.15 | length 6813.5
  Bottom Layer w10: U1.15@3344.73,7378.54 3192.3,7378.5 3090.6,7276.8 3090.6,7195.8 3047.1,7152.3 2597.6,7152.3 2480.6,7035.3 2480.6,2972 2558.6,2894 2607.8,2894 2784.9,2716.9 2856.3,2716.9 2897.3,2757.9 3130.1,2757.9 3208,2835.8 3210.1,2835.8 3266.4,2892.1 SW7.SW1@3998.89,2891.12
1_IO_1_3: SW23.SW1 U1.16 | length 11737.8
  Bottom Layer w10: U1.16@3344.73,7398.23 3181.6,7398.2 3073.2,7289.8 3073.2,7206.2 3035.3,7168.3 2589.7,7168.3 2463.7,7042.4 2463.7,2965.6 2555.2,2874.1 2590.7,2874.1 2764.8,2700 2863.4,2700 2904.2,2740.8 3141.8,2740.8 3274.7,2873.7 3921.6,2873.7 3960.5,2834.8 4037.1,2834.8 4071.6,2869.3 4071.6,2934.3 4101.8,2964.5 4101.8,3016.3 4073.1,3045 4073.1,3366.2 4256.7,3549.8 4303.3,3549.8 4354,3600.5 4354,3675.1 4380.7,3701.8 4380.7,3767.9 4337.9,3810.7 4337.9,4387 4386,4435.1 4386,4541.9 4339.4,4588.5 4339.4,5091.2 4398,5149.8 4398,5441.8 4302,5537.8 3972.7,5537.8 3862,5648.5 3862,6501.8 3986,6625.8 4260.8,6625.8 SW23.SW1@4264.69,6629.72
1_IO_1_4: SW22.SW1 U1.17 | length 10512.6
  Bottom Layer w10: U1.17@3344.73,7417.91 3175.5,7417.9 3056.7,7299.1 3056.7,7219.1 3021.9,7184.3 2579.9,7184.3 2444.6,7049.1 2444.6,2958.4 2545.3,2857.7 2574.6,2857.7 2758.4,2673.9 2862.1,2673.9 2913,2724.8 3150.7,2724.8 3283.2,2857.3 3914.5,2857.3 3956.6,2815.2 4044.6,2815.2 4088.6,2859.2 4088.6,2928.2 4120.6,2960.2 4120.6,3032.5 4090.6,3062.5 4090.6,3355.2 4265.6,3530.2 4307.6,3530.2 4373.6,3596.2 4373.6,3665.2 4403.6,3695.2 4403.6,3773.1 4356.6,3820.1 4356.6,4375.9 4407.9,4427.2 4407.9,4549.7 4359.9,4597.7 4359.9,5083.7 4419.4,5143.2 4419.4,5454.2 4322.4,5551.2 4322.4,5816.7 4387.4,5881.7 SW22.SW1@4481.29,5881.92
1_IO_1_5: SW20.SW1 U1.19 | length 10413.8
  Bottom Layer w10: U1.19@3344.73,7457.28 3074.9,7457.3 3040.5,7422.9 3040.5,7229 3012.1,7200.6 2571.7,7200.6 2426.9,7055.8 2426.9,2949.4 2541.1,2835.2 2570.3,2835.2 2749.5,2656 2867.7,2656 2913.6,2701.9 3157.4,2701.9 3294.7,2839.2 3654.1,2839.2 3689.7,2803.6 3689.7,2765.6 3724.1,2731.2 3777.9,2731.2 3843.4,2796.7 4049.8,2796.7 4106.8,2853.7 4106.8,2915.3 4139.7,2948.2 4139.7,3050 4111.2,3078.5 4111.2,3344.8 4274.9,3508.5 4317.5,3508.5 4393.1,3584.1 4393.1,3651.2 4422.7,3680.8 4422.7,3781.9 4375.3,3828.7 4375.3,4362.8 4431.1,4418.6 4431.1,4550.7 4381.8,4600 4381.8,5067.8 4444.7,5130.7 5011.8,5130.7 SW20.SW1@5013,5129.5
1_IO_1_6: SW21.SW1 U1.20 | length 9716.2
  Bottom Layer w10: U1.20@3344.73,7476.97 3059.1,7477 3020.9,7438.8 3020.9,7242.2 2996.1,7217.5 2554.9,7217.5 2408.8,7071.4 2408.8,2943.8 2533.5,2819.1 2559.1,2819.1 2738.8,2639.4 2880.4,2639.4 2926.4,2685.4 3164.8,2685.4 3302.5,2823.1 3644.9,2823.1 3672,2796 3672,2760.1 3718.1,2714 3783.6,2714 3848.6,2779 4061.5,2779 4123.4,2840.9 4123.4,2891.2 4157.5,2925.3 4157.5,3059.6 4127.5,3089.6 4127.5,3331.1 4283.2,3486.8 4331.9,3486.8 4420.1,3575 4420.1,3646.8 4440.1,3666.8 4440.1,3792.7 4397.6,3835.2 4397.6,4338.5 4441.4,4382.3 5007.7,4382.3 SW21.SW1@5011.89,4386.52
1_IO_1_7: SW18.SW1 U1.21 | length 8976.3
  Bottom Layer w10: U1.21@3344.7,7496.6 3046.8,7496.6 3004.1,7454 3004.1,7255.3 2983.4,7234.6 2546.2,7234.6 2391.2,7079.6 2391.2,2938.8 2527.8,2802.2 2550.7,2802.2 2729.9,2623 2888.6,2623 2934.6,2669 3173.6,2669 3309.6,2805 3637.6,2805 3655.9,2786.6 3655.9,2751.6 3710.4,2697.1 3797.2,2697.1 3859.6,2759.5 4064.9,2759.5 4141.6,2836.2 4141.6,2873.8 4181.1,2913.3 4181.1,3074.2 4146.1,3109.2 4146.1,3321.2 4290.8,3465.9 4341,3465.9 4450.6,3575.5 4679.6,3575.5 4743.6,3639.5 SW18.SW1@5011.89,3639.32
1_IO_2_0: SW19.SW1 U1.22 | length 8337.2
  Bottom Layer w10: U1.22@3344.73,7516.34 3040.9,7516.3 2986.7,7462.1 2986.7,7260.8 2976.5,7250.7 2537.9,7250.7 2374.9,7087.7 2374.9,2931.1 2376.1,2931.1 2522,2785.2 2543.9,2785.2 2724.9,2604.2 2898.5,2604.2 2945.6,2651.3 3183.6,2651.3 3319.1,2786.8 3630.1,2786.8 3639.9,2777.1 3639.9,2744 3708.6,2675.3 3802.6,2675.3 3869.6,2742.3 4070.6,2742.3 4161.6,2833.3 4165.1,2833.3 4221.6,2889.8 4922.7,2889.8 SW19.SW1@4924.19,2891.32
1_IO_2_1: SW12.SW1 U1.24 | length 13412.8
  Bottom Layer w10: U1.24@3344.73,7555.71 3033.4,7555.7 2970.7,7493 2970.7,7279.9 2958.2,7267.4 2531.1,7267.4 2358.5,7094.8 2358.5,2924.7 2515.6,2767.6 2537.6,2767.6 2717.5,2587.7 2906.2,2587.7 2953.8,2635.3 3196.4,2635.3 3329.9,2768.8 3589.9,2768.8 3702.8,2655.9 3809.5,2655.9 3878.9,2725.3 4086.9,2725.3 4234.4,2872.8 4845.4,2872.8 4893.4,2824.8 4947.4,2824.8 4996.4,2873.8 4996.4,2913.8 4976.4,2933.8 4962.9,2933.8 4945.4,2951.3 4923.9,2951.3 4911.4,2963.8 4911.4,3011.8 4950.9,3051.3 4980.4,3051.3 5005.9,3076.8 5005.9,3543.4 5082.9,3620.4 5082.9,3669.7 5072.2,3669.7 5057.9,3684 5048.2,3684 5034.3,3697.9 5017.2,3697.9 5002.3,3712.8 5002.3,3772.5 5040.6,3810.8 5077.6,3810.8 5118.6,3851.8 5118.6,4172.9 5074.5,4217 5074.5,4409.1 5052.4,4431.2 5046.1,4431.2 5031.4,4445.9 5002,4445.9 4984.1,4463.8 4984.1,4514.4 5025.9,4556.2 5065.9,4556.2 5107.9,4598.2 5107.9,5131.1 5054.2,5184.8 5035.1,5184.8 4999.2,5220.4 4999.2,5256 5035.3,5292.1 5056.4,5292.1 5085.5,5321.2 5085.5,5529.4 5027.4,5587.5 4803.6,5587.5 4645.9,5745.2 4645.9,6541.5 4737.3,6632.9 5009.3,6632.9 SW12.SW1@5012.39,6629.82
1_IO_2_2: SW13.SW1 U1.25 | length 12510.8
  Bottom Layer w10: U1.25@3344.73,7575.39 3028.9,7575.4 2953.2,7499.7 2953.2,7306.7 2930.2,7283.7 2516.2,7283.7 2341.2,7108.7 2341.2,2917.7 2508.2,2750.7 2528.3,2750.7 2709.2,2569.8 2916.3,2569.8 2963.2,2616.7 3204.2,2616.7 3334.2,2746.7 3585.2,2746.7 3692.3,2639.6 3822.1,2639.6 3888.2,2705.7 4095.2,2705.7 4245.2,2855.7 4837.2,2855.7 4885.2,2807.7 4955.2,2807.7 5026.2,2878.7 5026.2,3535.7 5102.2,3611.7 5102.2,3688.7 5115.2,3701.7 5115.2,3793.7 5139.2,3817.7 5139.2,4184.2 5093,4230.4 5093,4402.4 5112.4,4421.8 5112.4,4536.5 5130.3,4554.4 5130.3,5259.8 5103.6,5286.5 5103.6,5541.2 5037,5607.8 4814.3,5607.8 4682.3,5739.8 4682.3,5842.4 4721.7,5881.8 SW13.SW1@5229.19,5881.82
1_IO_2_3: SW15.SW1 U1.26 | length 11704.5
  Bottom Layer w10: U1.26@3344.73,7595.08 3020.3,7595.1 2934.7,7509.5 2934.7,7319.5 2914.9,7299.8 2503.9,7299.8 2324.7,7120.5 2324.7,2908.7 2504.5,2728.9 2525.7,2728.9 2702.8,2551.8 2924.9,2551.8 2973,2599.9 3215,2599.9 3344.5,2729.4 3578,2729.4 3685.9,2621.5 3829.6,2621.5 3895.5,2687.4 4105,2687.4 4255,2837.4 4573,2837.4 4611,2799.4 4611,2760.9 4643,2728.9 4698,2728.9 4731,2761.9 4731,2817.9 4750,2836.9 4830,2836.9 4876,2790.9 4967,2790.9 5043.5,2867.4 5043.5,3528.4 5120.5,3605.4 5120.5,3682.4 5168.7,3730.6 5168.7,4188 5115.3,4241.4 5115.3,4401.2 5130.5,4416.4 5130.5,4526.9 5156,4552.4 5156,5021.7 5266.5,5132.2 5757.5,5132.2 SW15.SW1@5759.09,5133.82
1_IO_2_4: SW14.SW1 U1.31 | length 11702.7
  Bottom Layer w10: U1.31@3636.07,7595.08 3675.1,7595.1 3691.4,7611.4 3691.4,7651.4 3672.4,7670.4 3631.4,7670.4 3608.4,7693.4 3608.4,7825.4 3543.4,7890.4 2729.7,7890.4 2600.7,7761.4 2600.7,7426.4 2306.7,7132.4 2306.7,2900.4 2502.7,2704.4 2521.1,2704.4 2691.1,2534.4 2935.7,2534.4 2977.7,2576.4 3218.7,2576.4 3351.7,2709.4 3569.7,2709.4 3675,2604.1 3836.4,2604.1 3902.7,2670.4 4118.7,2670.4 4265.7,2817.4 4567.7,2817.4 4594.7,2790.4 4594.7,2747.4 4631.7,2710.4 4708.7,2710.4 4764.7,2766.4 4974.7,2766.4 5063.7,2855.4 5063.7,3520.4 5138.7,3595.4 5138.7,3673.4 5193.7,3728.4 5193.7,4223.4 5356.8,4386.5 SW14.SW1@5759.09,4386.52
1_IO_2_5: SW17.SW1 U1.32 | length 6578.6
  Bottom Layer w10: U1.32@3636.07,7575.39 4258.7,7574 4524,7308.7 4524,6866 4585.8,6804.2 4740.7,6804.2 4765.5,6829 4900.3,6829 4913.6,6815.7 4941,6815.7 5009.5,6747.2 5009.5,6693.8 5026.3,6693.8 5041.4,6678.7 5057.3,6678.7 5117,6619 5117,6455 5257.8,6314.2 5257.8,6312.4 5348.5,6221.7 5348.5,5703.1 5533.7,5517.9 5783.7,5517.9 5887.4,5414.2 5887.4,4417.9 5693,4223.5 5359.7,4223.5 5231.9,4095.7 5231.9,3721.6 5314.2,3639.3 SW17.SW1@5759.09,3639.32
1_IO_2_6: SW16.SW1 U1.33 | length 6419.5
  Top Layer w10: v1(4203,7526.7) v1(4365.1,7526.7)
  Bottom Layer w10: U1.33@3636.07,7555.71 4173.99,7555.71 v1(4203,7526.7) ; v1(4365.1,7526.7) 4545.1,7346.7 4545.1,7132.4 4646.5,7031 5013.6,7031 5141.5,6903.1 5141.5,6472.5 5368,6246 5368,5717.4 5542.3,5543.1 5798.7,5543.1 5910.8,5431 5910.8,3097.4 5834.4,3021 5834.4,2906 SW16.SW1@5848.99,2891.42
1_IO_2_7: SW11.SW1 U1.35 | length 2728.4
  Top Layer w10: v1(4242.8,7479.3) v1(4475,7479.3)
  Bottom Layer w10: U1.35@3636.07,7516.34 4152.26,7516.34 4189.3,7479.3 v1(4242.8,7479.3) ; v1(4475,7479.3) 4577.1,7377.1 4577.1,7140.7 4660.7,7057.1 5015.7,7057.1 5162.1,6910.7 5162.1,6743.6 5276.4,6629.3 SW11.SW1@5760.69,6629.82
1_IO_3_0: SW24.SW1 U1.36 | length 3903.9
  Top Layer w10: v1(4311.5,7425.9) v1(4609.4,7425.9)
  Bottom Layer w10: U1.36@3636.07,7496.65 4130.05,7496.65 4200.8,7425.9 v1(4311.5,7425.9) ; v1(4609.4,7425.9) 4609.4,7158.8 4685.1,7083.1 5028,7083.1 5188,6923.1 5188,6752.3 5283,6657.3 5435.8,6657.3 5498,6719.5 5498,6786 5545.8,6833.8 5674.3,6833.8 5731.5,6776.6 5731.5,6727.3 5767.2,6691.6 5779.4,6691.6 5795.8,6675.2 5818.7,6675.2 5849.4,6644.5 5849.4,6575.2 6035.1,6389.5 6035.1,6099.4 5973,6037.3 5973,5886.2 SW24.SW1@5977.29,5881.92
1_IO_3_1: SW26.SW1 U1.37 | length 4950
  Top Layer w10: v1(4380.6,7379.7) v1(4648.6,7379.7)
  Bottom Layer w10: U1.37@3636.07,7476.97 4123.33,7476.97 4220.6,7379.7 v1(4380.6,7379.7) ; v1(4648.6,7379.7) 4648.6,7177.7 4718.6,7107.7 5683.8,7107.7 5931.3,6860.2 5931.3,6533.8 6062.8,6402.3 6062.8,6049.7 6089.2,6023.3 6089.2,5870.8 6012.8,5794.4 6012.8,5210.2 6099.7,5123.3 6495.86,5123.3 SW26.SW1@6506.39,5133.82
1_IO_3_2: SW25.SW1 U1.38 | length 5719.2
  Top Layer w10: v1(4440.6,7338.8) v1(4687.1,7338.8)
  Bottom Layer w10: U1.38@3636.07,7457.28 4115.12,7457.28 4233.6,7338.8 v1(4440.6,7338.8) ; v1(4687.1,7338.8) 4687.1,7177.3 4735.6,7128.8 5692.1,7128.8 5953.1,6867.8 5953.1,6540.3 6086.1,6407.3 6086.1,6061.3 6121.6,6025.8 6121.6,5818 6296.2,5643.4 6593.6,5643.4 6701.5,5535.5 6701.5,4769.7 6485.7,4553.9 6485.7,4407.2 SW25.SW1@6506.39,4386.52
1_IO_3_3: SW28.SW1 U1.40 | length 6646.5
  Top Layer w10: v1(3885.5,7433.5) 3885.5,7500.7 3916.9,7532.1 4144.1,7532.1 4367.7,7308.5 v1(4742.6,7308.5)
  Bottom Layer w10: U1.40@3636.07,7417.91 3869.91,7417.91 v1(3885.5,7433.5) ; v1(4742.6,7308.5) 4742.6,7189.2 4782.6,7149.2 5703.4,7149.2 5974.1,6878.5 5974.1,6552.7 6107.6,6419.2 6107.6,6073.6 6149.1,6032.1 6149.1,5822.8 6304.8,5667.1 6595.5,5667.1 6719.8,5542.8 6719.8,4756.4 6510.5,4547.1 6510.5,4541.4 6501.75,4532.65 6501.75,4468.75 6529.8,4440.7 6540.4,4440.7 6567.6,4413.5 6567.6,3882 6489.8,3804.2 6489.8,3655.8 SW28.SW1@6506.29,3639.32
1_IO_3_4: SW34.SW1 U1.41 | length 3806.2
  Top Layer w10: v1(3942.6,7432.8) 3942.6,7486.9 3969,7513.3 4139,7513.3 4363,7289.3 4694,7289.3 4717,7266.3 4745,7266.3 v1(4787,7308.3)
  Bottom Layer w10: U1.41@3636.07,7398.23 3908.03,7398.23 v1(3942.6,7432.8) ; v1(4787,7308.3) 4787,7202.3 4815,7174.3 5711,7174.3 5998,6887.3 5998,6563.3 6127,6434.3 6379,6434.3 6510,6565.3 6510,6628.5 SW34.SW1@6508.69,6629.82
1_IO_3_5: SW33.SW1 U1.42 | length 5952.4
  Top Layer w10: v1(4005.5,7432.1) 4005.5,7477.2 4007.1,7477.2 4027.2,7497.3 4132,7497.3 4359.2,7270 4683.5,7270 4717.7,7235.8 4757.8,7235.8 4824.9,7302.9 4824.9,7332.1 v1(4817.7,7339.3)
  Bottom Layer w10: U1.42@3636.07,7378.54 3951.94,7378.54 v1(4005.5,7432.1) ; v1(4817.7,7339.3) 4817.7,7212.2 4834.9,7195 5719.2,7195 6014.9,6899.3 6014.9,6577.9 6139.2,6453.6 6353.5,6453.6 6449.2,6549.3 6449.2,6673.7 6477,6701.5 6516.3,6701.5 6534.2,6683.6 6538.5,6683.6 6572.7,6649.3 6572.7,6586.8 6400.2,6414.3 6166.2,6414.3 6131.2,6379.3 6131.2,6089.3 6173.2,6047.3 6173.2,5837.3 6319.2,5691.3 6681.2,5691.3 6730.2,5740.3 6730.2,5876.9 SW33.SW1@6725.29,5881.82
1_IO_3_6: SW31.SW1 U1.43 | length 8066.5
  Top Layer w10: v1(4053.4,7430.3) 4053.4,7465.8 4064.4,7476.8 4128.4,7476.8 4356.4,7248.8 4677.4,7248.8 4714.9,7211.3 4766.4,7211.3 4851.9,7296.8 4851.9,7361.8 4827.9,7385.8 v1(4816.4,7385.8)
  Bottom Layer w10: U1.43@3636.07,7358.86 3981.96,7358.86 v1(4053.4,7430.3) ; v1(4816.4,7385.8) 4827.4,7385.8 4848.4,7364.8 4848.4,7233.8 4862.9,7219.3 5722.9,7219.3 6033.9,6908.3 6033.9,6593.3 6157.6,6469.7 6178.2,6469.7 6197.4,6488.8 6197.4,6652.8 6237.9,6693.3 6246.9,6693.3 6263.4,6709.8 6263.4,6771.3 6312.9,6820.8 6336.4,6820.8 6344.4,6828.8 6547.4,6828.8 6618.4,6757.8 6618.4,6601.8 6410.9,6394.8 6176.9,6394.8 6151.4,6369.3 6151.4,6096.3 6191.9,6055.8 6191.9,5851.3 6329.4,5713.8 6646.9,5713.8 6675.9,5742.8 6675.9,5844.3 6658.4,5861.8 6658.4,5922.8 6659.9,5922.8 6692.4,5955.3 6730.9,5955.3 6749.9,5936.3 6754.4,5936.3 6791.9,5898.8 6791.9,5852.8 6757.9,5818.8 6757.9,5730.8 6710.4,5683.3 6710.4,5587.3 6742.4,5555.3 6742.4,5002.8 6777.9,4967.3 7198.4,4967.3 7259.4,5028.3 7259.4,5127.9 SW31.SW1@7253.59,5133.72
1_IO_3_7: SW32.SW1 U1.44 | length 9106.3
  Top Layer w10: v1(4101,7429.8) 4150.7,7429.8 4349.4,7231.1 4671,7231.1 4707.9,7194.2 4774.4,7194.2 4870.7,7290.5 4870.7,7387.8 4844.6,7413.9 4787.8,7413.9 4774.6,7400.7 v1(4774.6,7399.7)
  Bottom Layer w10: U1.44@3636.07,7339.17 4010.37,7339.17 v1(4101,7429.8) ; v1(4774.6,7399.7) 4788.1,7413.4 4843.6,7413.4 4846.5,7410.5 4847.8,7410.5 4869.4,7388.9 4869.4,7252.9 4881.8,7240.5 5730.2,7240.5 5944.9,7025.8 6550.5,7025.8 6641.5,6934.8 6641.5,6588.8 6428.5,6375.8 6185,6375.8 6168,6358.8 6168,6106.3 6215,6059.3 6509,6059.3 6533,6083.3 6788.5,6083.3 6830.5,6041.3 6830.5,5857.3 6781,5807.8 6781,5726.3 6732,5677.3 6732,5597.3 6762.5,5566.8 6762.5,5221.8 6875.5,5108.8 7119,5108.8 7211.5,5201.3 7265,5201.3 7282.5,5183.8 7294.5,5183.8 7320,5158.3 7320,5053.3 7216.5,4949.8 6776.5,4949.8 6737.5,4910.8 6737.5,4745.3 6628,4635.8 6628,4465.8 6743.8,4350 7210.5,4350 7225.8,4365.3 7232.3,4365.3 SW32.SW1@7253.49,4386.52
1_IO_4_0: SW29.SW1 U1.45 | length 9281.4
  Top Layer w10: v1(4127.5,7400.5) 4155.4,7400.5 4341.5,7214.4 4665,7214.4 4703.6,7175.8 4782.9,7175.8 4892.9,7285.8 4892.9,7396.5 4857.9,7431.5 4751.5,7431.5 v1(4727.9,7407.9)
  Bottom Layer w10: U1.45@3636.07,7319.49 4046.49,7319.49 v1(4127.5,7400.5) ; v1(4727.9,7407.9) 4730,7407.9 4752.9,7430.8 4860.1,7430.8 4891.5,7399.4 4891.5,7273.7 4905.8,7259.4 5743.4,7259.4 5952.5,7050.3 6564.5,7050.3 6668.5,6946.3 6668.5,6438.3 6861.8,6245 6861.8,5855.6 6805.8,5799.6 6805.8,5721 6753.8,5669 6753.8,5606.3 6780.5,5579.6 7244.5,5579.6 7376.5,5447.6 7376.5,5082.3 7221.8,4927.6 6779.2,4927.6 6755.2,4903.6 6755.2,4733 6652.5,4630.3 6652.5,4480.9 6759.2,4374.3 7132.5,4374.3 7209.8,4451.6 7264.5,4451.6 7280.5,4435.6 7315.2,4435.6 7363.2,4387.6 7363.2,3686.4 7309.8,3633 7259.9,3633 SW29.SW1@7253.59,3639.32
1_IO_4_1: SW35.SW1 U1.47 | length 6051.4
  Top Layer w10: v1@4148.5,7374.85 4337.1,7186.25 4667.8,7186.25 4699.9,7154.15 4789.2,7154.15 4912.1,7277.05 4912.1,7406.95 4870.6,7448.45 4721.15,7448.45 v1(4688,7415.3)
  Bottom Layer w10: U1.47@3636.07,7280.12 4053.32,7280.12 v1(4148,7374.8) ; v1(4688,7415.3) 4721.8,7449.1 4875.1,7449.1 4914.4,7409.8 4914.4,7300.6 4937.3,7277.7 5768,7277.7 5971.6,7074.1 6577.3,7074.1 6696.6,6954.8 6696.6,6486.2 6889.7,6293.1 7663.7,6293.1 7815.6,6445 7815.6,6622.3 SW35.SW1@7808.29,6629.62
1_IO_4_2: SW36.SW1 U1.48 | length 7069
  Top Layer w10: v1(4151.5,7333.5) 4316.5,7168.5 4661.5,7168.5 4691.5,7138.5 4695.82,7138.5 4697.22,7137.1 4804.3,7137.1 4930,7262.8 4930,7419.2 4878.2,7471 v1(4712.8,7471)
  Bottom Layer w10: U1.48@3636.07,7260.43 4078.43,7260.43 v1(4151.5,7333.5) ; v1(4712.8,7471) 4880.4,7471 4933.1,7418.3 4933.1,7309.8 4949.15,7293.75 5777.05,7293.75 5979.6,7091.2 6590.3,7091.2 6715.3,6966.2 6715.3,6493.9 6898.8,6310.4 7525.3,6310.4 7741.7,6526.8 7741.7,6669 7768.1,6695.4 7820.9,6695.4 7833.8,6682.5 7841,6682.5 7866,6657.5 7866,6464.8 7674.5,6273.3 7674.5,6157.5 7552.4,6035.4 7487.4,6035.4 7464.5,6012.5 7464.5,5890.2 SW36.SW1@7472.99,5881.72
1_IO_4_3: SW38.SW1 U1.49 | length 8770.7
  Top Layer w10: v1(4156,7290.5) 4162.4,7290.5 4313.8,7139.1 4663.8,7139.1 4691,7111.9 4812.4,7111.9 4948.8,7248.3 4948.8,7437 4888.2,7497.6 4700.2,7497.6 v1(4671.2,7468.6)
  Bottom Layer w10: U1.49@3636.07,7240.75 4106.25,7240.75 v1(4156,7290.5) ; v1(4671.2,7468.6) 4699.8,7497.2 4886.8,7497.2 4953.3,7430.7 4953.3,7322.9 4964.8,7311.4 5788.4,7311.4 5990.5,7109.3 6596.9,7109.3 6732.6,6973.6 6732.6,6507.9 6911.2,6329.3 7242.6,6329.3 7531.2,6617.9 7531.2,6762.2 7596.9,6827.9 7864,6827.9 7911.9,6780 7911.9,6480.8 7698.3,6267.2 7698.3,6148.6 7582.9,6033.2 7582.9,5902.5 7424.3,5743.9 7424.3,5197.2 7527.3,5094.2 7961.2,5094.2 SW38.SW1@8000.79,5133.82
1_IO_4_4: SW37.SW1 U1.50 | length 10177
  Top Layer w10: v1(4161.9,7249.2) 4144.9,7249.2 4113.9,7280.2 4113.9,7363.2 4077.9,7399.2 3863.9,7399.2 3843.9,7419.2 3843.9,7502.2 3905.9,7564.2 4523.9,7564.2 v1(4633.9,7454.2)
  Bottom Layer w10: U1.50@3636.07,7221.06 4133.76,7221.06 v1(4161.9,7249.2) ; v1(4633.9,7454.2) 4633.9,7483.2 4674.9,7524.2 4898.9,7524.2 4974.9,7448.2 4974.9,7347.2 4990.9,7331.2 5800.9,7331.2 6004.9,7127.2 6609.9,7127.2 6751.9,6985.2 6751.9,6514.2 6918.9,6347.2 7212.9,6347.2 7369.9,6504.2 7369.9,6970.2 7479.9,7080.2 7781.9,7080.2 7929.9,6932.2 7929.9,6471.2 7726.2,6267.5 7726.2,6146.4 7602.5,6022.7 7602.5,5896.5 7441.9,5735.9 7441.9,5212.3 7538,5116.2 7915,5116.2 7945,5146.2 7945,5159.3 7982.5,5196.8 8015.5,5196.8 8029.5,5182.8 8053,5182.8 8069,5166.8 8069,4610 7994.8,4535.8 7994.8,4392.5 SW37.SW1@8000.69,4386.62
1_IO_4_5: SW40.SW1 U1.52 | length 11238.5
  Top Layer w10: v1(4193.2,7221) 4141.2,7221 4092.7,7269.5 4092.7,7357.5 4068.2,7382 3859.7,7382 3856.9,7384.8 3854.4,7384.8 3827.7,7411.5 3827.7,7511 3898.2,7581.5 4574.5,7581.5 4630.5,7525.5 v1(4630.5,7521.2)
  Bottom Layer w10: U1.52@3636.07,7181.69 4153.89,7181.69 v1(4193.2,7221) ; v1(4630.5,7521.2) 4653.4,7544.1 4910.5,7543.3 5001.2,7452.6 5001.2,7365.5 5014.1,7352.6 5811.5,7352.6 6015.9,7148.2 6623.8,7148.2 6772.4,6999.6 6772.4,6539.8 6935.5,6376.7 7202.2,6376.7 7342.9,6517.4 7342.9,6993.4 7463.2,7113.7 7804,7113.7 7957.7,6960 7957.7,6469.3 7750.3,6261.9 7750.3,6135.9 7628.1,6013.7 7628.1,5878.6 7466.9,5717.4 7466.9,5215.2 7545.2,5136.9 7893.7,5136.9 7971.4,5214.6 7971.4,5239.4 8021.4,5289.4 8088.1,5289.4 8108.1,5269.4 8108.1,3935.5 7952.6,3780 7952.6,3687.4 SW40.SW1@8000.69,3639.32
1_IO_4_6: SW46.SW1 U1.53 | length 8282.5
  Top Layer w10: v1(4223.6,7187) 4140.7,7187 4073.6,7254.1 4073.6,7341.3 4052.2,7362.7 3846.5,7362.7 3807.2,7402 3807.2,7522 3888.6,7603.4 4606.5,7603.4 v1(4632.9,7577)
  Bottom Layer w10: U1.53@3636.07,7162.01 4198.61,7162.01 v1(4223.6,7187) ; v1(4632.9,7577) 4635.8,7577 4646.5,7566.3 4922.2,7566.3 5021.5,7467 5021.5,7383.5 5034.4,7370.6 5822.9,7370.6 6028.6,7164.9 6632.9,7164.9 6794.4,7003.4 6794.4,6549.1 6947.9,6395.6 7194.4,6395.6 7326.85,6528.05 7326.85,7006.65 7455.8,7135.6 7815.7,7135.6 7978.6,6972.7 7978.6,6540.1 8151.9,6366.8 8512.3,6366.8 8572.9,6427.4 8572.9,6613 SW46.SW1@8555.99,6629.92